# Altium PCB PCB2_manual.PcbDoc
Units mil, origin at the board's own origin, x right, y up, seen from the top; angles counter-clockwise.
Board outline 6000 x 4000 mil, 2 copper layers (Top Layer, Bottom Layer); 62 components, 25 nets, 146 pads, 0 vias.
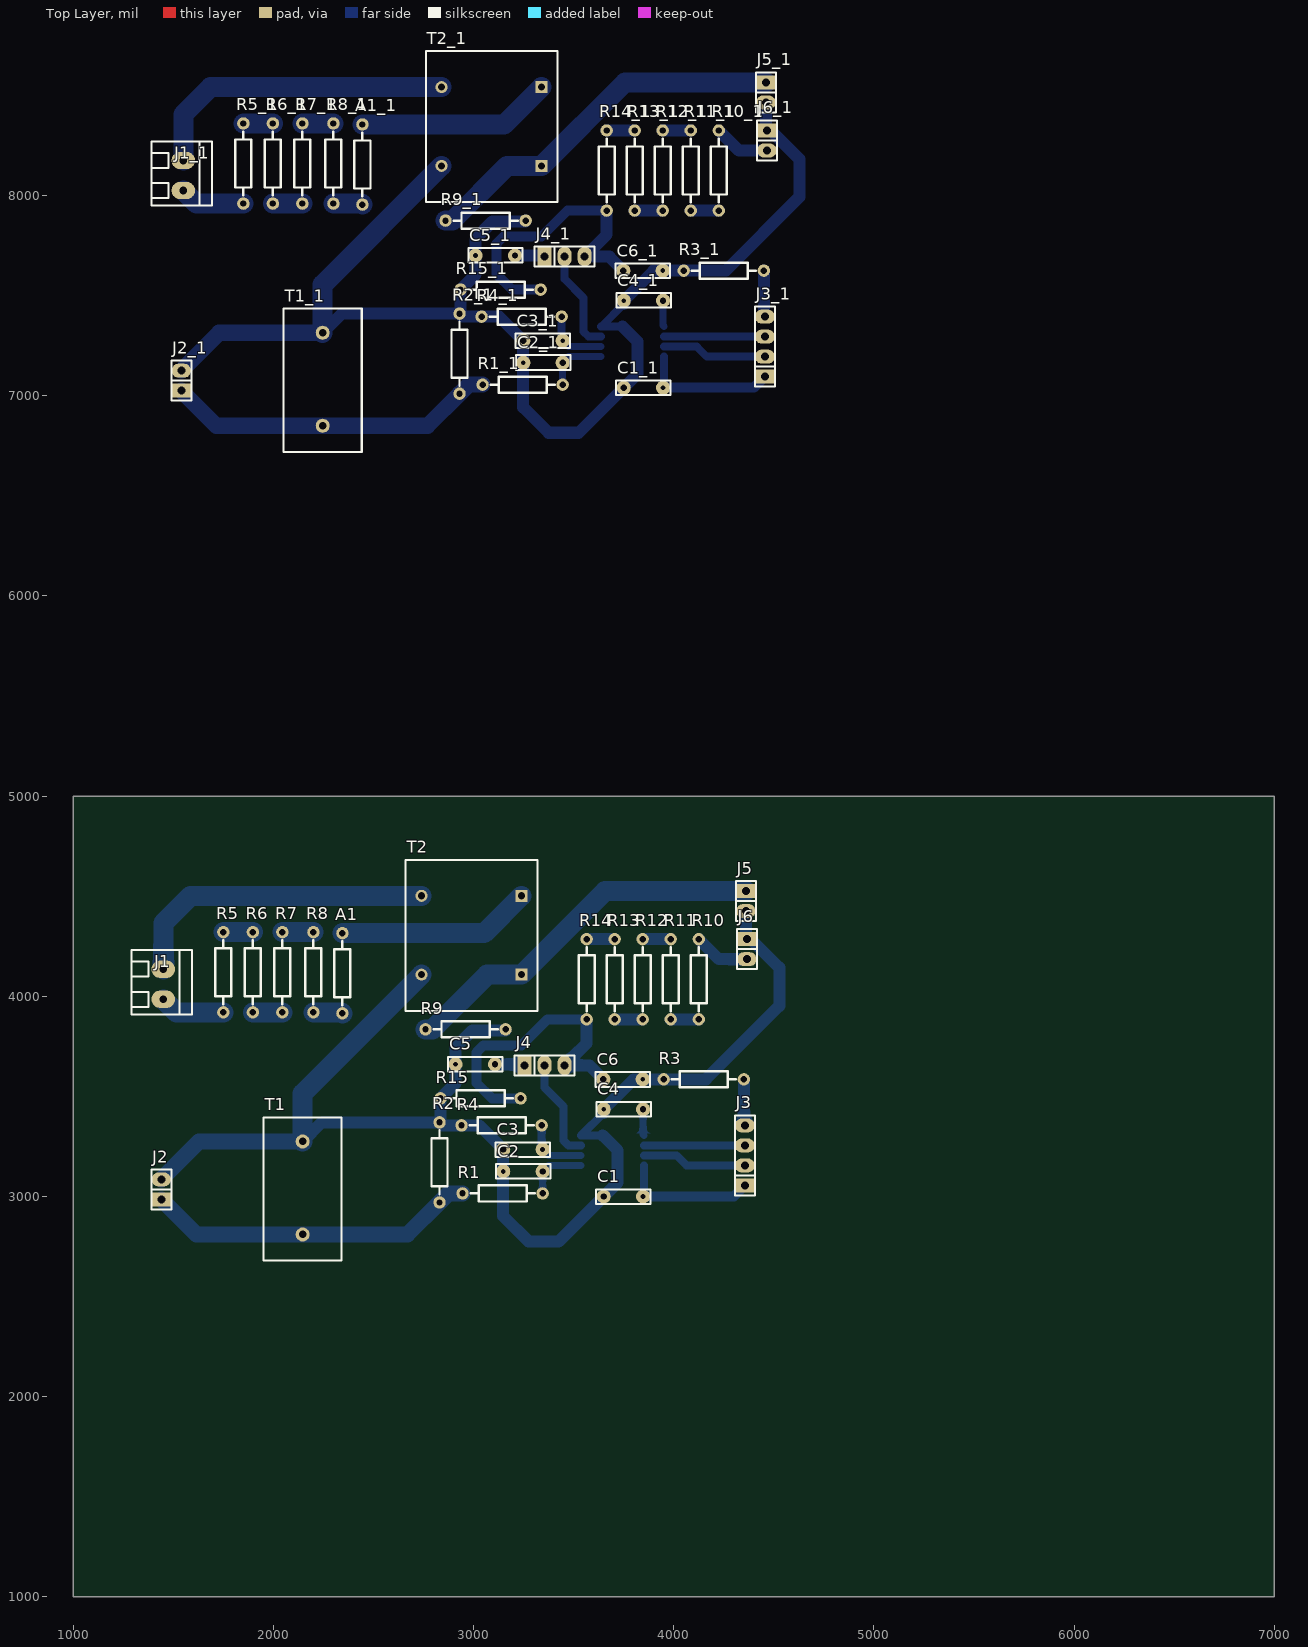
[diagram p0: Top Layer view]
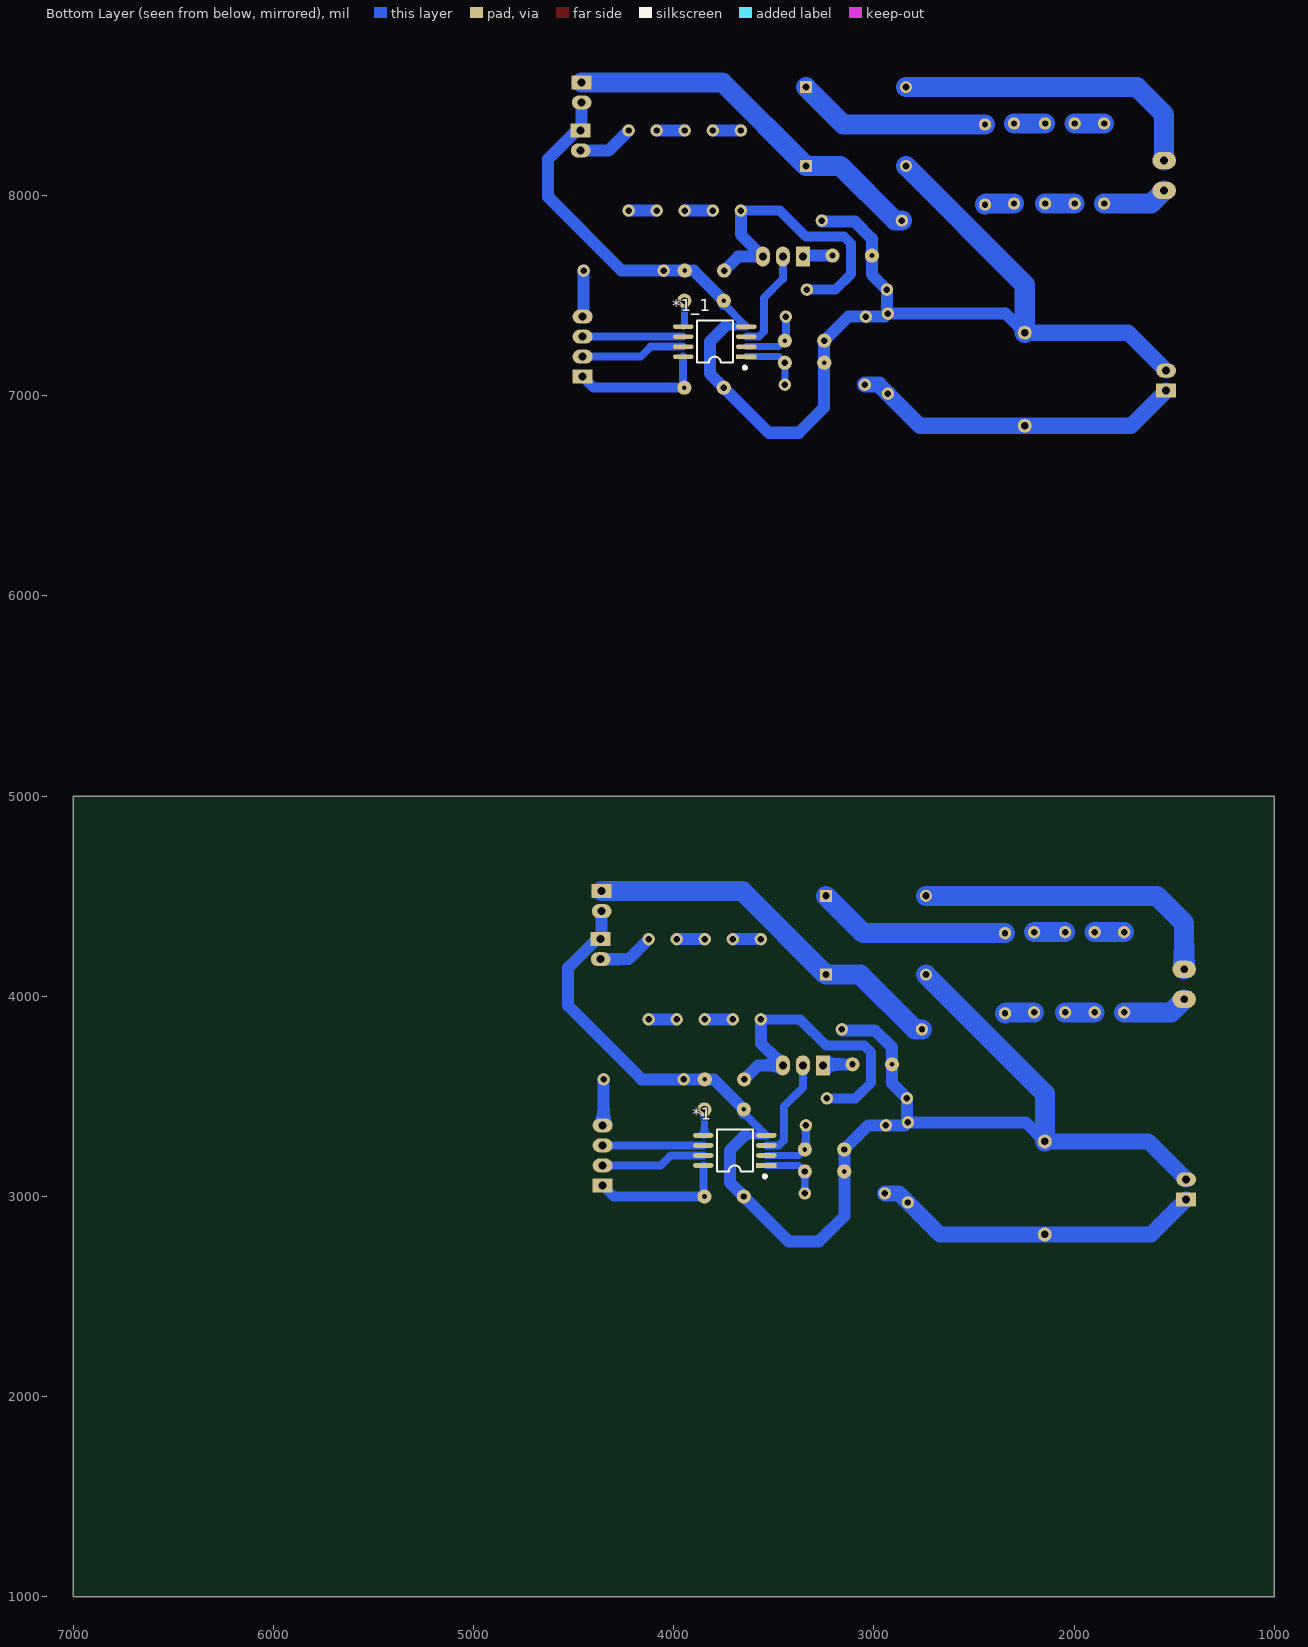
[diagram p1: Bottom Layer view, seen from below]

## Layer stack, top to bottom
Top Solder: solder mask 0.4, Solder Resist, Dk 3.5
Top Layer: signal copper 1.4
Dielectric 1: dielectric 12.6, FR-4, Dk 4.8
Bottom Layer: signal copper 1.4
Bottom Solder: solder mask 0.4, Solder Resist, Dk 3.5

## Board outline
1000,1000 7000,1000 7000,5000 1000,5000

## Design rules (kind name [scope] priority, off if disabled: settings)
Clearance [All] p1: gap=0 ignorepadtopadclearanceinfootprint=FALSE
PolygonConnect [All] p1: connectstyle=Relief reliefconductorwidth=10 reliefentries=4 polygonreliefangle="90 Angle" airgapwidth=10
RoutingVias [All] p1: holewidth=28 width=50 viastyle="Through Hole" minholewidth=28 minwidth=50 maxholewidth=28 maxwidth=50
SolderMaskExpansion [All] p1: expansion=4
Width [All] p1: maxlimit=200 minlimit=10 preferedwidth=50
30 further rules are at their usual default settings.

## Components (designator, comment, footprint, x,y, rotation, side; value= is the part's Value field where it differs from the comment)
*1 "HLW8110" SOP8W_M 3695,3230 r0 bottom
*1_1 "HLW8110" SOP8W_M 3795,7270 r0 bottom (schematic designator *1)
A1 "20k" AXIAL0.4 2345,3915 r90 top
A1_1 "20k" AXIAL0.4 2445,7955 r90 top (schematic designator A1)
C1 "0.1uf" CAP2 3650,3000 r0 top
C1_1 "0.1uf" CAP2 3750,7040 r0 top (schematic designator C1)
C2 "330nf" CAP2 3345,3125 r180 top
C2_1 "330nf" CAP2 3445,7165 r180 top (schematic designator C2)
C3 "330nf" CAP2 3148.15,3235 r0 top
C3_1 "330nf" CAP2 3248.15,7275 r0 top (schematic designator C3)
C4 "0.1uf" CAP2 3846.85,3435 r180 top
C4_1 "0.1uf" CAP2 3946.85,7475 r180 top (schematic designator C4)
C5 "33nf" CAP2 3106.85,3660 r180 top
C5_1 "33nf" CAP2 3206.85,7700 r180 top (schematic designator C5)
C6 "33nf" CAP2 3648.15,3585 r0 top
C6_1 "33nf" CAP2 3748.15,7625 r0 top (schematic designator C6)
J1 "CON2" KF128-3.81-2P 1450,4060 r270 top
J1_1 "CON2" KF128-3.81-2P 1550,8100 r270 top (schematic designator J1)
J2 "CON2" sip-2 1440,2985 r90 top
J2_1 "CON2" sip-2 1540,7025 r90 top (schematic designator J2)
J3 "CON4" sip-4 4355,3055 r90 top
J3_1 "CON4" sip-4 4455,7095 r90 top (schematic designator J3)
J4 "CON3" sip-3 3255,3655 r0 top
J4_1 "CON3" sip-3 3355,7695 r0 top (schematic designator J4)
J5 "CON2" sip-2 4360,4525 r270 top
J5_1 "CON2" sip-2 4460,8565 r270 top (schematic designator J5)
J6 "CON2" sip-2 4365,4285 r270 top
J6_1 "CON2" sip-2 4465,8325 r270 top (schematic designator J6)
R1 "100R" AXIAL0.4 2945,3015 r0 top
R1_1 "100R" AXIAL0.4 3045,7055 r0 top (schematic designator R1)
R2 "10R" AXIAL0.4 2830,3370 r270 top
R2_1 "10R" AXIAL0.4 2930,7410 r270 top (schematic designator R2)
R3 "0R" AXIAL0.4 3950,3585 r0 top
R3_1 "0R" AXIAL0.4 4050,7625 r0 top (schematic designator R3)
R4 "100R" AXIAL0.4 2940,3355 r0 top
R4_1 "100R" AXIAL0.4 3040,7395 r0 top (schematic designator R4)
R5 "20k" AXIAL0.4 1750,3920 r90 top
R5_1 "20k" AXIAL0.4 1850,7960 r90 top (schematic designator R5)
R6 "20k" AXIAL0.4 1897.5,4320 r270 top
R6_1 "20k" AXIAL0.4 1997.5,8360 r270 top (schematic designator R6)
R7 "20k" AXIAL0.4 2045,3920 r90 top
R7_1 "20k" AXIAL0.4 2145,7960 r90 top (schematic designator R7)
R8 "20k" AXIAL0.4 2200,4320 r270 top
R8_1 "20k" AXIAL0.4 2300,8360 r270 top (schematic designator R8)
R9 "100R" AXIAL0.4 3160,3835 r180 top
R9_1 "100R" AXIAL0.4 3260,7875 r180 top (schematic designator R9)
R10 "20K" AXIAL0.4 4125,4285 r270 top
R10_1 "20K" AXIAL0.4 4225,8325 r270 top (schematic designator R10)
R11 "20K" AXIAL0.4 3985,3885 r90 top
R11_1 "20K" AXIAL0.4 4085,7925 r90 top (schematic designator R11)
R12 "20K" AXIAL0.4 3845,4285 r270 top
R12_1 "20K" AXIAL0.4 3945,8325 r270 top (schematic designator R12)
R13 "20K" AXIAL0.4 3705,3885 r90 top
R13_1 "20K" AXIAL0.4 3805,7925 r90 top (schematic designator R13)
R14 "20K" AXIAL0.4 3565,4285 r270 top
R14_1 "20K" AXIAL0.4 3665,8325 r270 top (schematic designator R14)
R15 "1k" AXIAL0.4 2835,3490 r0 top
R15_1 "1k" AXIAL0.4 2935,7530 r0 top (schematic designator R15)
T1 "Current transformer" ZMCT103C 2146.5,2810 r90 top
T1_1 "Current transformer" ZMCT103C 2246.5,6850 r90 top (schematic designator T1)
T2 "DA101C" ZMPT101B 2990,4305 r270 top
T2_1 "DA101C" ZMPT101B 3090,8345 r270 top (schematic designator T2)

## Footprints (in the part's own frame and the unit in brackets; to place one, negate y for a bottom-side part, rotate by r counter-clockwise, add the part's x,y. Pads: shape width x height; smd on the part's side, far side on the other; paste and mask are expansions set on the pad)
AXIAL0.4 [mil]
  round 62 hole 32: 1(0,0) 2(400,0)
  silkscreen extent 40,-40 360,40
CAP2 [mm]
  round 1.8 hole 0.8: 1(0,0)
  round 1.8 hole 0.6: 2(5,0)
  silkscreen extent -0.98,-0.95 5.93,0.9
KF128-3.81-2P [mm] "螺钉式接线端子，脚距3.81mm"
  oval 2.2x3 hole 1: 1(-1.905,0) 2(1.905,0)
  silkscreen extent -4.32,-4.04 3.81,3.63, body extent -4.31,-3.9 3.81,3.5, height 8.55
sip-2 [mil]
  rect 70x100 hole 40: 1(0,0)
  oval 70x98.42 hole 40: 2(100,0)
  silkscreen extent -50,-50 150,50
sip-3 [mil]
  rect 70x100 hole 40: 1(0,0)
  oval 70x100 hole 40: 2(100,0) 3(200,0)
  silkscreen extent -50,-50 250,50
sip-4 [mil]
  rect 70x100 hole 40: 1(0,0)
  oval 70x100 hole 40: 2(100,0) 3(200,0) 4(300,0)
  silkscreen extent -50,-50 350,50
SOP8W_M [mm] "5.3*8.3*1.8mm（长宽高）  淘宝ID:黄晶宝石"
  rect 2.6x0.6 smd: 1(-4,1.905)
  oval 2.6x0.6 smd: 2(-4,0.635) 3(-4,-0.635) 4(-4,-1.905) 5(4,-1.905) 6(4,-0.635) 7(4,0.635) 8(4,1.905)
  silkscreen extent -3.94,-2.67 2.29,3.43, body extent -3.94,-2.64 3.94,2.64, height 1.9
ZMCT103C [mil]
  round 70 hole 37.5: 1(0,0) 2(464.57,0)
  silkscreen extent -130,-195 585,195
ZMPT101B [mil]
  rect 60x60 hole 35.98: 1(-196.85,250) 3(196.85,250)
  round 60 hole 35.98: 2(-196.85,-250) 4(196.85,-250)
  silkscreen extent -376,-329 378,329

## Part data
A1 A1_1 R1 R1_1 R2 R2_1 R3 R3_1 R4 R4_1 R5 R5_1 R6 R6_1 R7 R7_1 R8 R8_1 R9 R9_1 R10 R10_1 R11 R11_1 R12 R12_1 R13 R13_1 R14 R14_1 R15 R15_1: library part RES, "电阻"
C1 C1_1 C2 C2_1 C3 C3_1 C4 C4_1 C5 C5_1 C6 C6_1: library part CAP1
J1 J1_1 J2 J2_1 J3 J3_1 J4 J4_1 J5 J5_1 J6 J6_1: "Connector"
T2 T2_1: library part DA10XC, "数字隔离变压器", ROM名称=数字隔, 学习资源=www.ooocke.

## Nets (pads, with @x,y where several pads share a name; then routed paths per layer and width w, separated by ;. In a path a pad name is that pad's centre, name@x,y a point inside that pad or via, vN(x,y) a via of type N, cw(c..) or ccw(c..) an arc to the next point about the centre after c; other vN are vias at no path point)
+3.3V: *1.8 C1.2 J3.1 | length 688.3
  Bottom Layer w40: C1.2@3852.48,3005.63 *1.8
  Bottom Layer w50: C1.2@3852.48,3005.63 C1.2 4300,3000 J3.1
GND: *1.4 C1.1 C2.2 C3.1 C4.2 C5.2 C6.2 J2.2 J5.2 J6.1 R2.1 R3.1 R4.1 R9.1 R15.1 T1.2 T2.4 | length 6949.6
  Bottom Layer w40: 3645,3305 *1.4 C4.2@3650,3417.48
  Bottom Layer w60: T1.2 2241.93,3370 R2.1 ; R9.1 3160,3830 2995,3830 2910,3745 C5.2 2910,3565 R15.1 2835,3375 R2.1 ; 3645,3305 3720,3230 3720,3070 C1.1 3425,2775 3275,2775 3148.15,2901.85 C2.2 C3.1 3028.15,3355 R4.1 2845,3355 R2.1 ; C4.2@3650,3417.48 C4.2 3800,3585 C6.2 R3.1 4160,3585 4527.64,3952.64 4527.64,4142.64 4375.28,4295 4365,4295 J6.1 4360,4290 J5.2
  Bottom Layer w80: J2.2 1629.57,3274.57 T1.2
  Bottom Layer w100: T1.2 2146.5,3514.65 T2.4
L: J1.2 R5.1 | length 326.9
  Bottom Layer w100: J1.2 1515,3920 R5.1
N: J1.1 T2.2 | length 1576.7
  Bottom Layer w100: J1.1 1450,4365 1586.85,4501.85 T2.2
Net*1_1: *1.1 C2.1 R1.2 | length 314.9
  Bottom Layer w35: R1.2 C2.1 3375,3155 *1.1
Net*1_2: *1.2 C3.2 R4.2 | length 327
  Bottom Layer w35: C3.2 3375,3205 *1.2
  Bottom Layer w40: R4.2 3340,3240 C3.2
Net*1_3: *1.3 J4.2 | length 512.2
  Bottom Layer w40: J4.2 3355,3543.86 3450,3448.86 3450,3280 3475,3255 *1.3
Net*1_5: *1.5 C4.1 | length 132.3
  Bottom Layer w35: C4.1 3846.85,3310.63 *1.5
NetA1_1: A1.1 R8.2 | length 147.1
  Bottom Layer w100: R8.2 2340,3920 A1.1
NetA1_2: A1.2 T2.1 | length 972.4
  Bottom Layer w100: A1.2 3053.15,4315 T2.1
NetC5_1: C5.1 J4.1 | length 150.2
  Bottom Layer w60: C5.1 3250,3660 J4.1
NetC6_1: C6.1 J4.3 R14.2 R15.2 | length 1521
  Bottom Layer w50: R15.2 3091.85,3490 3015,3566.85 3015,3720 3050,3755 3240,3755 3370,3885 R14.2
  Bottom Layer w60: R14.2 3565,3765 J4.3 3578.15,3655 C6.1
NetJ2_1: J2.1 R1.1 R2.2 T1.1 | length 1662.4
  Bottom Layer w80: J2.1 1615,2810 T1.1 2670,2810 R2.2 2875,3015 R1.1
NetJ3_4: J3.4 R3.2 | length 232.1
  Bottom Layer w60: R3.2 4350,3360 J3.4
NetJ5_1: J5.1 R9.2 T2.3 | length 1885.8
  Bottom Layer w100: R9.2 2795,3835 3068.15,4108.15 T2.3 3656.85,4525 J5.1
NetJ6_2: J6.2 R10.1 | length 281.4
  Bottom Layer w60: R10.1 4225,4185 J6.2
NetR5_2: R5.2 R6.1 | length 147.5
  Bottom Layer w100: R5.2 R6.1
NetR6_2: R6.2 R7.1 | length 147.5
  Bottom Layer w100: R6.2 R7.1
NetR7_2: R7.2 R8.1 | length 155
  Bottom Layer w100: R7.2 R8.1
NetR10_2: R10.2 R11.1 | length 140
  Bottom Layer w60: R11.1 R10.2
NetR11_2: R11.2 R12.1 | length 140
  Bottom Layer w60: R12.1 R11.2
NetR12_2: R12.2 R13.1 | length 140
  Bottom Layer w60: R13.1 R12.2
NetR13_2: R13.2 R14.1 | length 140
  Bottom Layer w60: R14.1 R13.2
RX1: *1.6 J3.3 | length 502.5
  Bottom Layer w40: *1.6 J3.3
TX1: *1.7 J3.2 | length 523.2
  Bottom Layer w40: *1.7 4015,3205 4065,3155 J3.2
pads on no net: *1_1.1 *1_1.2 *1_1.3 *1_1.4 *1_1.5 *1_1.6 *1_1.7 *1_1.8 A1_1.1 A1_1.2 C1_1.1 C1_1.2 C2_1.1 C2_1.2 C3_1.1 C3_1.2 C4_1.1 C4_1.2 C5_1.1 C5_1.2 C6_1.1 C6_1.2 J1_1.1 J1_1.2 J2_1.1 J2_1.2 J3_1.1 J3_1.2 J3_1.3 J3_1.4 J4_1.1 J4_1.2 J4_1.3 J5_1.1 J5_1.2 J6_1.1 J6_1.2 R1_1.1 R1_1.2 R2_1.1 R2_1.2 R3_1.1 R3_1.2 R4_1.1 R4_1.2 R5_1.1 R5_1.2 R6_1.1 R6_1.2 R7_1.1 R7_1.2 R8_1.1 R8_1.2 R9_1.1 R9_1.2 R10_1.1 R10_1.2 R11_1.1 R11_1.2 R12_1.1 R12_1.2 R13_1.1 R13_1.2 R14_1.1 R14_1.2 R15_1.1 R15_1.2 T1_1.1 T1_1.2 T2_1.1 T2_1.2 T2_1.3 T2_1.4
copper on no net: | length 19716.2
  Bottom Layer w35: 3445,7055 3445,7165 3475,7195 3637.52,7195 ; 3445,7275 3475,7245 3637.52,7245 ; 3946.85,7475 3946.85,7350.63 3952.48,7345
  Bottom Layer w40: 3440,7395 3440,7280 3445,7275 ; 3455,7695 3455,7583.86 3550,7488.86 3550,7320 3575,7295 3637.52,7295 ; 3745,7345 3637.52,7345 3750,7457.48 ; 3952.48,7045.63 3952.48,7195 ; 3952.48,7245 4115,7245 4165,7195 4455,7195 ; 3952.48,7295 4455,7295
  Bottom Layer w50: 3335,7530 3191.85,7530 3115,7606.85 3115,7760 3150,7795 3340,7795 3470,7925 3665,7925 ; 3952.48,7045.63 3946.85,7040 4400,7040 4455,7095
  Bottom Layer w60: 2246.5,7314.57 2341.93,7410 2930,7410 ; 3206.85,7700 3350,7700 3355,7695 ; 3260,7875 3260,7870 3095,7870 3010,7785 3010,7700 3010,7605 2935,7530 2935,7415 2930,7410 ; 3665,7925 3665,7805 3555,7695 3678.15,7695 3748.15,7625 ; 3665,8325 3805,8325 ; 3745,7345 3820,7270 3820,7110 3750,7040 3525,6815 3375,6815 3248.15,6941.85 3248.15,7165 3248.15,7275 3128.15,7395 3040,7395 2945,7395 2930,7410 ; 3750,7457.48 3750,7475 3900,7625 3945,7625 4050,7625 4260,7625 4627.64,7992.64 4627.64,8182.64 4475.28,8335 4465,8335 4465,8325 4460,8330 4460,8465 ; 3805,7925 3945,7925 ; 3945,8325 4085,8325 ; 4085,7925 4225,7925 ; 4225,8325 4325,8225 4465,8225 ; 4450,7625 4450,7400 4455,7395
  Bottom Layer w80: 1540,7025 1715,6850 2246.5,6850 2770,6850 2930,7010 2975,7055 3045,7055 ; 1540,7125 1729.57,7314.57 2246.5,7314.57
  Bottom Layer w100: 1550,8025 1615,7960 1850,7960 ; 1550,8175 1550,8405 1686.85,8541.85 2840,8541.85 ; 1850,8360 1997.5,8360 ; 1997.5,7960 2145,7960 ; 2145,8360 2300,8360 ; 2246.5,7314.57 2246.5,7554.65 2840,8148.15 ; 2300,7960 2440,7960 2445,7955 ; 2445,8355 3153.15,8355 3340,8541.85 ; 2860,7875 2895,7875 3168.15,8148.15 3340,8148.15 3756.85,8565 4460,8565